# Altium PCB SwitchUniControl_TO220.PcbDoc
Units mm, origin at the board's own origin, x right, y up, seen from the top; angles counter-clockwise.
Board outline 53.97 x 35.56 mm, 2 copper layers (Top Layer, Bottom Layer); 17 components, 11 nets, 50 pads, 0 vias.
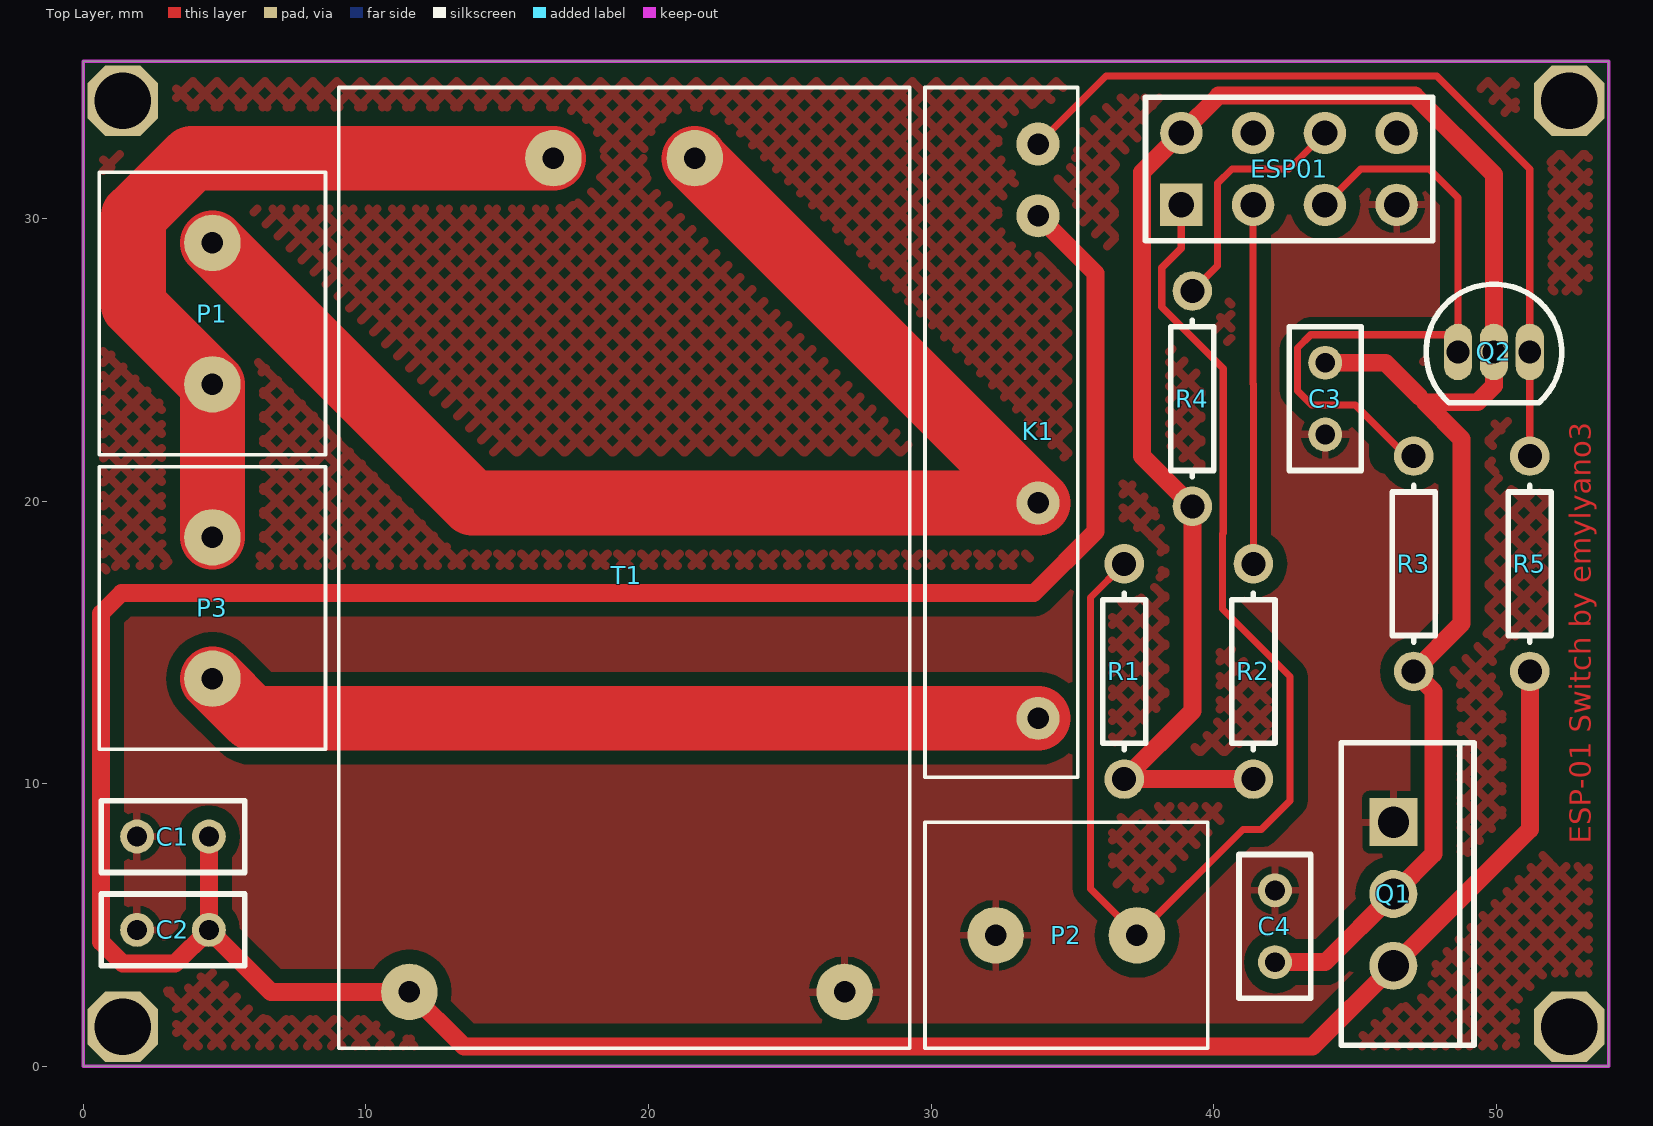
[diagram p0: Top Layer view]
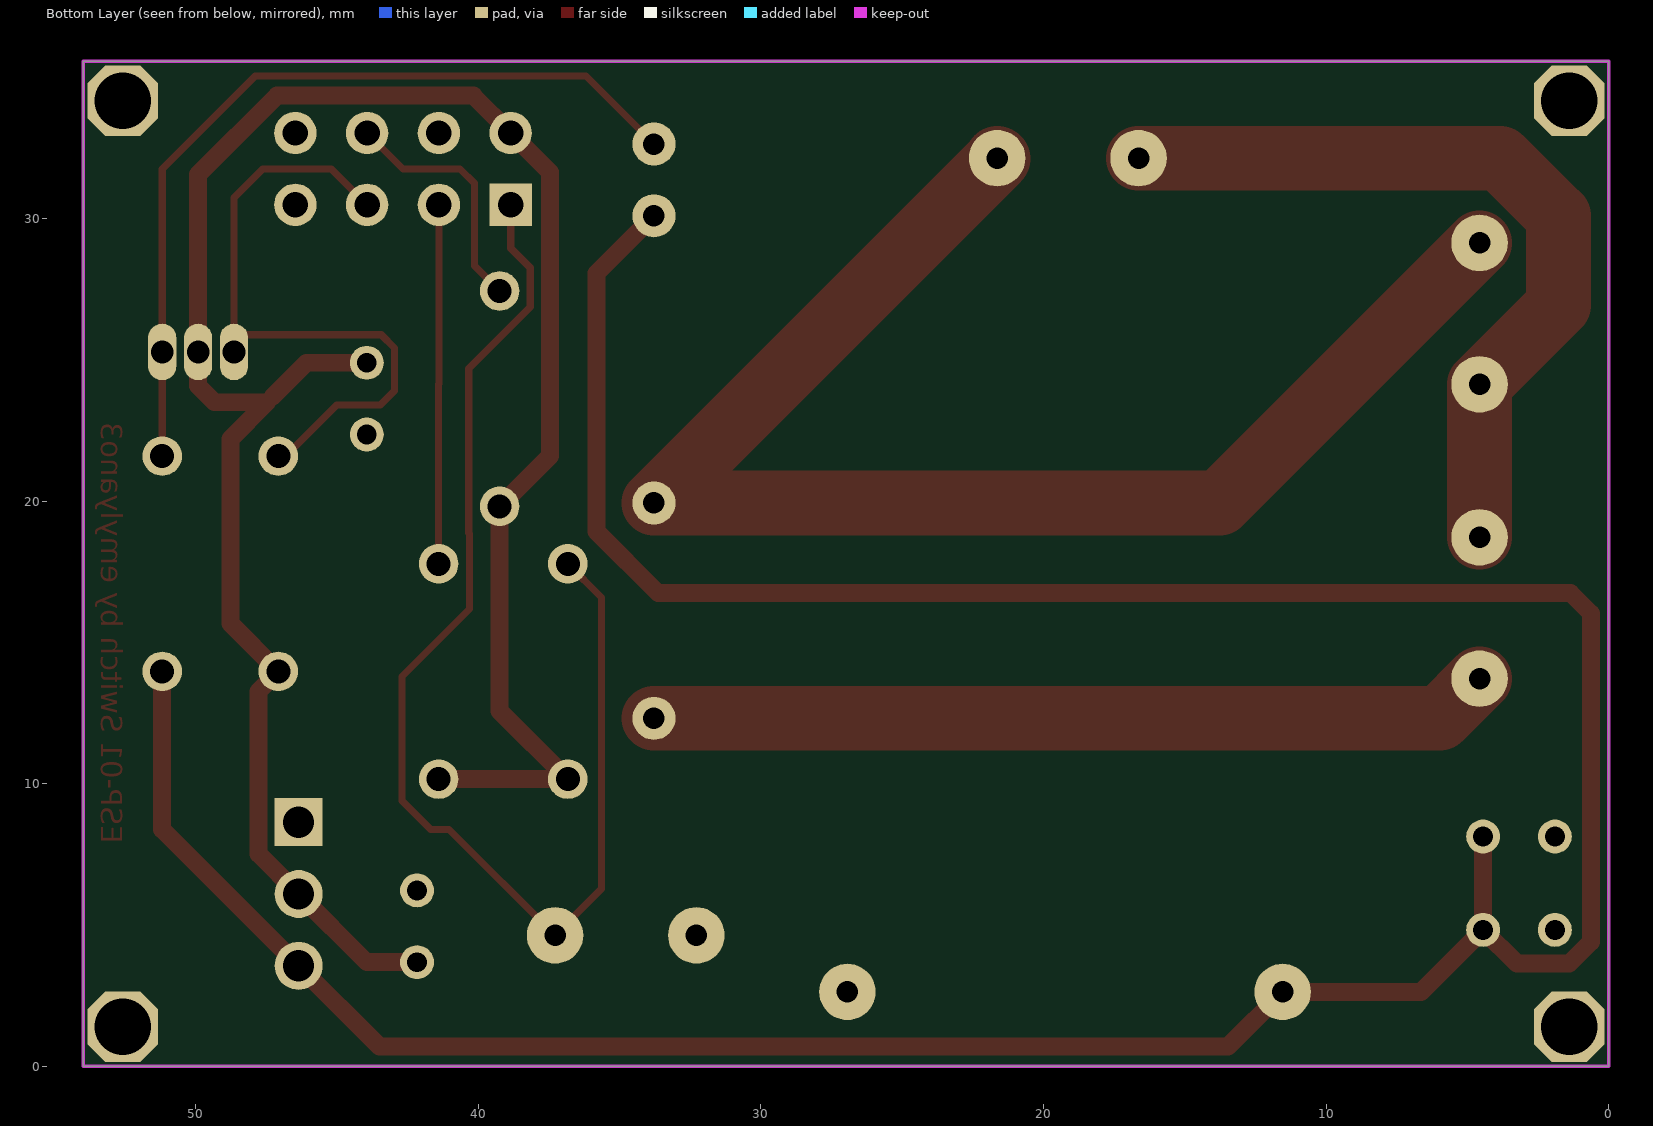
[diagram p1: Bottom Layer view, seen from below]

## Layer stack, top to bottom
Top Solder: solder mask 0.0102, Solder Resist, Dk 3.5
Top Layer: signal copper 0.0356
Dielectric 1: dielectric 0.32, FR-4, Dk 4.8
Bottom Layer: signal copper 0.0356
Bottom Solder: solder mask 0.0102, Solder Resist, Dk 3.5

## Board outline
0,0 0,35.56 53.975,35.56 53.975,0

## Design rules (kind name [scope] priority, off if disabled: settings)
Clearance "Polygon clearence" [InPolygon] p1: gap=0.5 ignorepadtopadclearanceinfootprint=FALSE
Clearance [All] p2: gap=0.254 ignorepadtopadclearanceinfootprint=FALSE except(0: Arc-Hole Track-Hole SMDPad-Hole THPad-Hole Via-Hole Fill-Hole Poly-Hole Region-Hole Text-Hole)
PolygonConnect [All] p1: connectstyle=Relief reliefconductorwidth=0.254 reliefentries=4 polygonreliefangle="90 Angle" airgapwidth=0.254
RoutingLayers [All] p1: top layer_v5=TRUE bottom layer_v5=FALSE
RoutingVias [All] p1: holewidth=0.711 width=1.27 viastyle="Through Hole" minholewidth=0.711 minwidth=1.27 maxholewidth=0.711 maxwidth=1.27
SolderMaskExpansion [All] p1: expansion=0.102
Width "pwr gnd width" [InNet('Power GND')] p1: maxlimit=2.54 minlimit=1.524 preferedwidth=2.286
Width "load width" [InNet('NetK1_1')] p2: maxlimit=2.54 minlimit=1.524 preferedwidth=2.286
Width "5 vdc width" [InNet('+5VDC')] p3: maxlimit=0.762 minlimit=0.508 preferedwidth=0.635
Width "3.3 vdc width" [InNet('+3.3VDC')] p4: maxlimit=0.762 minlimit=0.508 preferedwidth=0.635
Width "220 vac width" [InNet('220VAC')] p5: maxlimit=2.54 minlimit=1.524 preferedwidth=2.286
Width "gnd width" [InNet('GND')] p6: maxlimit=0.762 minlimit=0.508 preferedwidth=0.635
Width "all width" [All] p7: maxlimit=0.254 minlimit=0.254 preferedwidth=0.254
29 further rules are at their usual default settings.

## Components (designator, comment, footprint, x,y, rotation, side; value= is the part's Value field where it differs from the comment)
C1 "Cap Pol1" RAD-0.1 3.175,8.128 r180 top value=100uf
C2 "Cap" RAD-0.1 3.175,4.826 r180 top value=100nf
C3 "Cap" RAD-0.1 43.942,23.622 r90 top value=100nF
C4 "Cap" RAD-0.1 42.164,4.953 r270 top value=100nF
ESP01 "Header 4X2A" HDR2X4_CEN 38.852,30.48 r0 top
K1 "G3MB-202P DC5" "G3MB-202P DC5" 29.782,34.631 r270 top
P1 "Power" ScrewTerminal-X2 8.572,21.63 r90 top
P2 "Switch" ScrewTerminal-X2 29.782,0.635 r0 top
P3 "Load" ScrewTerminal-X2 8.572,11.216 r90 top
Q1 "Regulador 3.3V" TO220 46.355,6.096 r270 top
Q2 "2N7000" SOT54 49.911,25.273 r270 top
R1 "Res1" AXIAL-0.3 36.83,13.97 r90 top value=10K
R2 "Res1" AXIAL-0.3 41.402,13.97 r90 top value=10K
R3 "Res1" AXIAL-0.3 47.075,17.78 r270 top value=10K
R4 "Res1" AXIAL-0.3 39.243,23.622 r270 top value=1K
R5 "Res1" AXIAL-0.3 51.181,17.78 r270 top value=10K
T1 "220VAC - 5VDC" HLK-PM 21.637,32.131 r270 top

## Footprints (in the part's own frame and the unit in brackets; to place one, negate y for a bottom-side part, rotate by r counter-clockwise, add the part's x,y. Pads: shape width x height; smd on the part's side, far side on the other; paste and mask are expansions set on the pad)
AXIAL-0.3 [mm] "Axial Device, Thru-Hole; 2 Leads; 0.3 in Pin Spacing"
  round 1.4 hole 0.85: 1(-3.81,0) 2(3.81,0)
  silkscreen extent -2.77,-0.76 2.77,0.76
"G3MB-202P DC5" [mil] "RELAY MINI SSR 240VAC@2A ZERO"
  round 60 hole 30: 1(878.74,157.48) 2(578.74,157.48) 3(178.74,157.48) 4(78.74,157.48)
  silkscreen extent 0,0 961,213
HDR2X4_CEN [mm] "Connector; Header; 4x2 Position"
  rect 1.5x1.5 hole 0.9: 1(0,0)
  round 1.5 hole 0.9: 2(2.54,0) 3(5.08,0) 4(7.62,0) 5(0,2.54) 6(2.54,2.54) 7(5.08,2.54) 8(7.62,2.54)
  silkscreen extent -1.27,-1.27 8.89,3.81
HLK-PM [mm] "Trans 220VAC-5/12/3,3 VDC"
  round 2 hole 0.762: 1(0,0) 2(0,-5) 3(29.5,5.3) 4(29.5,-10.1)
  silkscreen extent -2.5,-12.6 31.5,7.6
RAD-0.1 [mm] "Radial Cap, Thru-Hole; 2 Leads; 0.1 in Pin Spacing"
  round 1.2 hole 0.7: 1(-1.27,0) 2(1.27,0)
  silkscreen extent -2.54,-1.27 2.54,1.27
ScrewTerminal-X2 [mm]
  round 2 hole 0.762: 1(2.5,4) 2(7.5,4)
  silkscreen extent 0,0 10,8
SOT54 [mm] "TO, Flat Index; 3 In-Line, Axial Leads; Body Dia. 4.6mm; Leads 0.48 x 0.45 mm (max)"
  oval 2x1 hole 0.8: 1(0,1.27) 2(0,0) 3(0,-1.27)
  silkscreen extent -2.4,-2.4 1.8,2.4
TO220 [mm] "TO, Thru-Hole, Vertical, Heatsink Mounted; 3 In-Line Leads; Pitch 2.54 mm"
  rect 1.7x1.7 hole 1.1: 1(-2.54,0)
  round 1.7 hole 1.1: 2(0,0) 3(2.54,0)
  silkscreen extent -5.35,-1.85 5.35,2.85

## Part data
C1: "Polarized Capacitor (Radial)", LatestRevisionDate=17-Jul-2002, LatestRevisionNote="Re-released for DXP Platform.", PackageDescription="Polarized Capacitor (Radial); 2 Leads", PackageReference=RB7.6-15, Published=8-Jun-2000, Publisher="Altium Limited"
C2 C3 C4: "Capacitor", LatestRevisionDate=17-Jul-2002, LatestRevisionNote="Re-released for DXP Platform.", PackageDescription="Radial Cap, Thru-Hole; 2 Leads; 0.3 in Pin Spacing", PackageReference=RAD-0.3, Published=8-Jun-2000, Publisher="Altium Limited"
ESP01: "Header, 4-Pin, Dual row", LatestRevisionDate=17-Jul-2002, LatestRevisionNote="Re-released for DXP Platform.", Publisher="Altium Limited"
K1: "RELAY MINI SSR 240VAC@2A ZERO", Mfr=Omron, Mfr PN="G3MB-202P DC5"
P1 P2 P3: library part ScrewTerminal
Q1: library part AMS1117
Q2: "N-channel Enhancement Mode Field-effect Transistor", Code_JEDEC=TO-92, Code_JEITA=SC-43, ComponentLink1Description="Manufacturer Link", ComponentLink1URL=http://www.semiconductors.philips.com/, ComponentLink2Description=Datasheet, ComponentLink2URL=http://www.semiconductors.philips.com/acrobat/datasheets/2N7000-03.pdf, DatasheetVersion=19-May-2000, LatestRevisionDate=12-Dec-2006, LatestRevisionNote="Footprint pad sequence fixed.", PackageDescription="Plastic Single-Ended Leaded (through hole) package; 3 Leads (TO-92)", PackageReference=SOT54, PackageVersion=Feb-1997, Published=17-Sep-2003, Publisher="Altium Limited"
R1 R2 R3 R4 R5: "Resistor", LatestRevisionDate=17-Jul-2002, LatestRevisionNote="Re-released for DXP Platform.", PackageDescription="Axial Device, Thru-Hole; 2 Leads; 0.3 in Pin Spacing", PackageReference=AXIAL-0.3, Published=8-Jun-2000, Publisher="Altium Limited"
T1: library part HLK-PM, "HLK-PM*", Mfr=HLK-PM01

## Free pads (board coordinates)
  oct 2.5x2.5 hole 2: 1(1.397,34.163) 2(52.578,34.163) 3(52.578,1.397) 4(1.397,1.397)

## Nets (pads, with @x,y where several pads share a name; then routed paths per layer and width w, separated by ;. In a path a pad name is that pad's centre, name@x,y a point inside that pad or via, vN(x,y) a via of type N, cw(c..) or ccw(c..) an arc to the next point about the centre after c; other vN are vias at no path point)
220VAC: K1.2 P1.2 T1.1 | length 50.3
  Top Layer w2.286: P1.2 13.771,19.931 K1.2 21.61,32.104 T1.1
+3.3VDC: C3.2 C4.2 ESP01.5 Q1.2 Q2.2 R1.1 R2.1 R3.2 R4.2 | length 81.2
  Top Layer w0.635: R2.1 R1.1 39.243,12.573 R4.2 37.463,21.592 37.463,31.632 ESP01.5 40.173,34.342 47.116,34.342 49.911,31.547 Q2.2 49.911,24.079 49.327,23.495 47.473,23.495 48.768,22.2 48.768,15.663 R3.2 47.777,13.267 47.777,7.518 Q1.2 43.942,3.683 C4.2 ; C3.2 46.076,24.892 47.269,23.698
+5VDC: C1.1 C2.1 K1.3 Q1.3 R5.2 T1.4 | length 125.2
  Top Layer w0.635: C1.1 C2.1 ; K1.3 35.814,28.059 35.814,18.923 33.63,16.739 1.346,16.739 0.635,16.027 0.635,4.394 1.397,3.632 3.251,3.632 C2.1 ; R5.2 51.181,8.382 Q1.3 43.497,0.699 13.469,0.699 T1.4 6.64,2.631 C2.1
GND: C1.2 C2.2 C3.1 C4.1 ESP01.4 P2.1 Q1.1 T1.3
NetESP01_1: ESP01.1 P2.2 R1.2 | length 45
  Top Layer w0.254: R1.2 35.636,16.586 35.636,6.281 P2.2 41.029,8.382 41.681,8.382 42.697,9.398 42.697,13.792 40.31,16.18 40.31,18.847 40.335,18.872 40.335,24.689 38.162,26.862 38.162,28.256 38.852,28.946 ESP01.1
NetESP01_2: ESP01.2 R2.2 | length 12.7
  Top Layer w0.254: ESP01.2 41.392,24.14 41.402,24.13 R2.2
NetESP01_3: ESP01.3 Q2.3 R3.1 | length 23.6
  Top Layer w0.254: ESP01.3 45.202,31.75 47.625,31.75 48.641,30.734 Q2.3@48.641,25.883 ; R3.1 46.812,21.59 45.009,23.393 43.469,23.393 42.961,23.901 42.961,25.41 43.434,25.883 Q2.3@48.641,25.883 ; Q2.3 Q2.3@48.641,25.883
NetESP01_7: ESP01.7 R4.1 | length 8.7
  Top Layer w0.254: R4.1 40.132,28.321 40.132,31.242 40.64,31.75 42.662,31.75 ESP01.7
NetK1_1: K1.1 P3.1 | length 29.8
  Top Layer w2.286: P3.1 5.977,12.311 K1.1
NetK1_4: K1.4 Q2.1 R5.1 | length 29.9
  Top Layer w0.254: K1.4 36.191,35.04 47.891,35.04 51.181,31.75 Q2.1 R5.1
"Power GND": P1.1 P3.2 T1.2 | length 28.2
  Top Layer w2.286: P3.2 P1.1 1.778,26.924 1.778,30.099 1.813,30.099 3.845,32.131 T1.2
pads on no net: ESP01.6 ESP01.8

## Polygon pours and split planes (outlines as drawn)
no net on Top Layer "Fill dead" (hatched 45Degree grid 0.6 track 0.3, pour order 42): 53.975,35.56 0,35.56 0,0 53.975,0
GND on Top Layer "GND" (solid, remove dead copper, pour order 40): 53.975,35.56 0,35.56 0,0 53.975,0

## Keep-outs
Keep-Out Layer:
  the board outline again, w0.127

## Other copper
Top Layer:
  text "ESP-01 Switch by emylyano3" at 53.34,7.874 h0.75 r90